# Altium PCB Quad FC V10.0.PcbDoc
Units mm, origin at the board's own origin, x right, y up, seen from the top; angles counter-clockwise.
Board outline 50 x 50 mm, 2 copper layers (Top Layer, Bottom Layer); 81 components, 49 nets, 331 pads, 113 vias.
Unrouted connection lines stored in the file: 24.
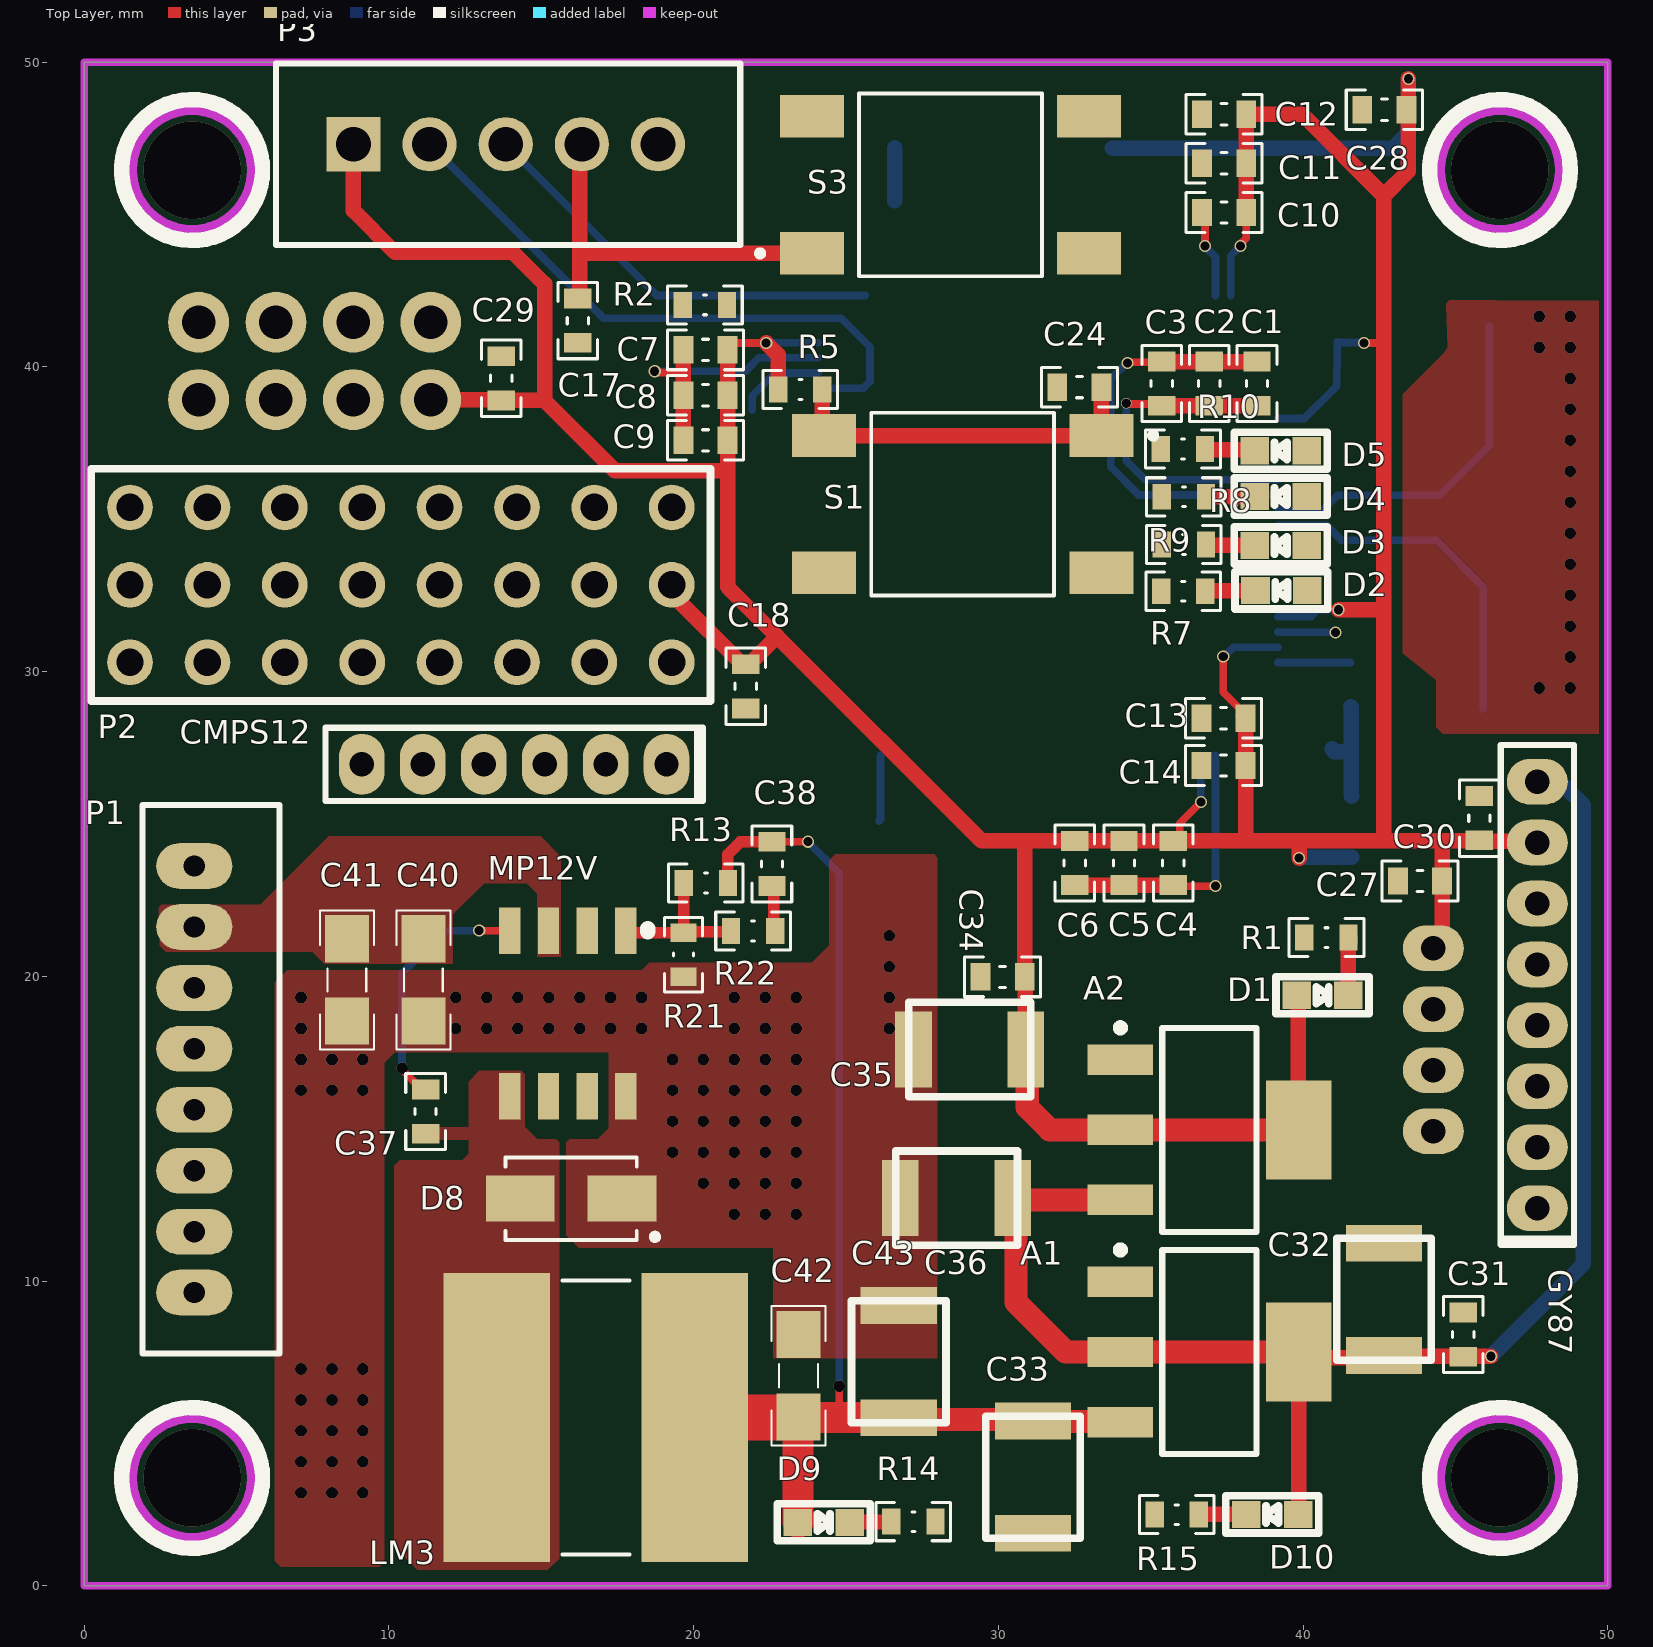
[diagram p0: Top Layer view]
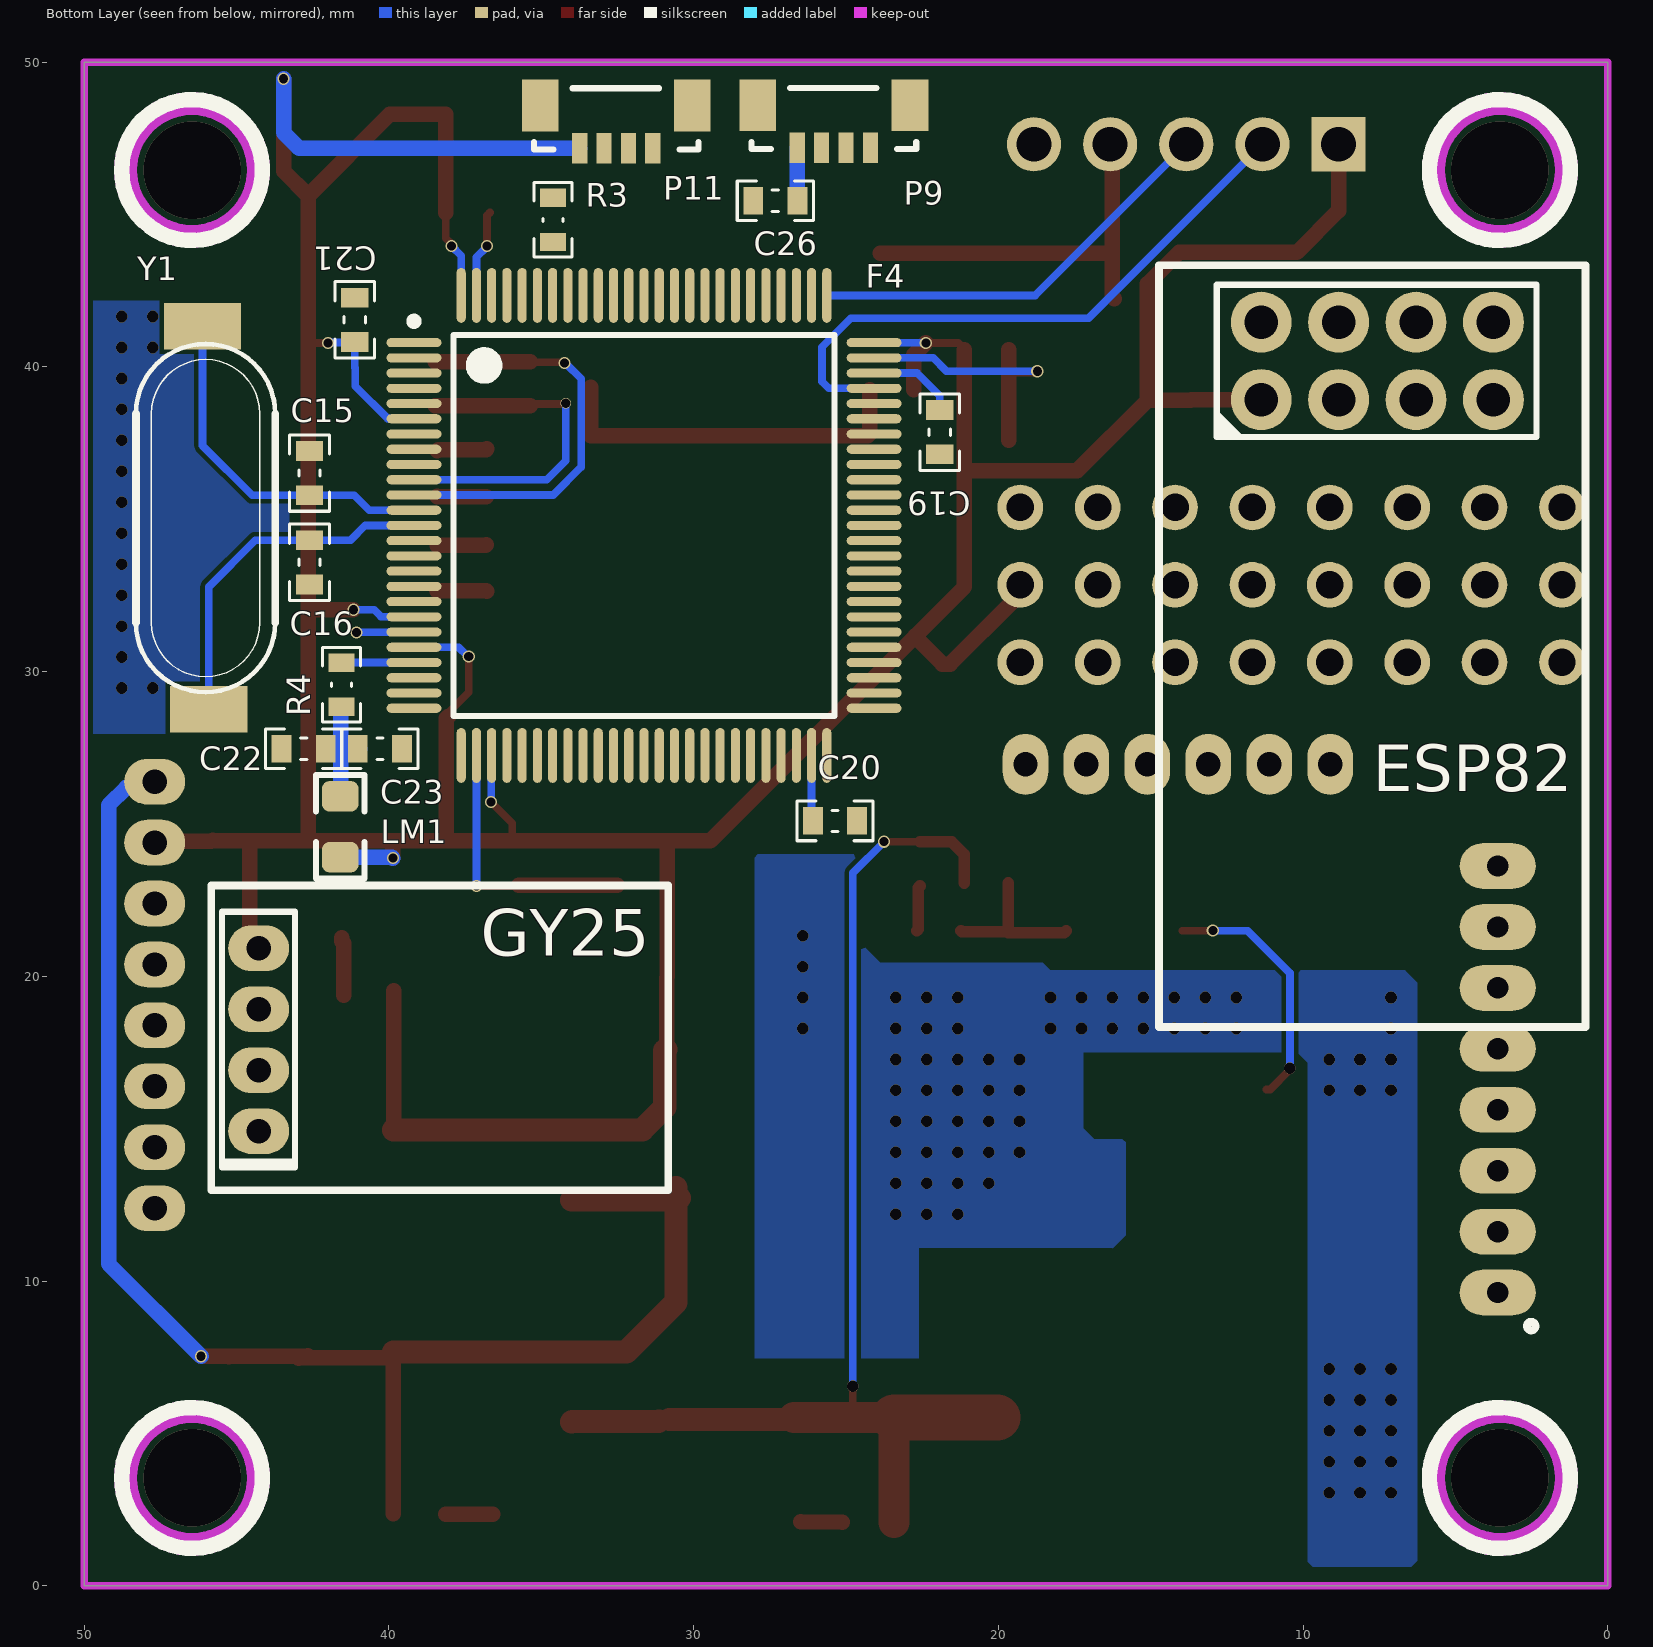
[diagram p1: Bottom Layer view, seen from below]

## Layer stack, top to bottom
Top Solder: solder mask 0.0102, Solder Resist, Dk 3.5
Top Layer: signal copper 0.0356
Dielectric 1: dielectric 0.32, FR-4, Dk 4.8
Bottom Layer: signal copper 0.0356
Bottom Solder: solder mask 0.0102, Solder Resist, Dk 3.5

## Board outline
0,0 50,0 50,50 0,50

## Design rules (kind name [scope] priority, off if disabled: settings)
Clearance [All] p1: gap=0.152 ignorepadtopadclearanceinfootprint=FALSE except(0: Arc-Hole Track-Hole SMDPad-Hole THPad-Hole Via-Hole Fill-Hole Poly-Hole Region-Hole Text-Hole)
HoleSize [All] p1: absolutevalues=TRUE maxlimit=10 minlimit=0.025 maxpercent=80.000 minpercent=20.000
PlaneConnect PlaneConnect_2 [All] p1: planeconnectstyle=Direct reliefexpansion=0.508 reliefentries=4 reliefconductorwidth=0.254 reliefairgap=0.254
PlaneConnect PlaneConnect_1 [All] p2: planeconnectstyle=Relief reliefexpansion=0.508 reliefentries=4 reliefconductorwidth=0.254 reliefairgap=0.254
PlaneConnect [All] p3: planeconnectstyle=Relief reliefexpansion=0.508 reliefentries=4 reliefconductorwidth=0.254 reliefairgap=0.254
PolygonConnect PolygonConnect_15 [All vs IsNamedPolygon('GND_L02_P008')] p1: connectstyle=Direct reliefconductorwidth=0.254 reliefentries=4 polygonreliefangle="90 Angle" airgapwidth=0.254
PolygonConnect PolygonConnect_14 [All vs IsNamedPolygon('GND_L01_P007')] p2: connectstyle=Direct reliefconductorwidth=0.254 reliefentries=4 polygonreliefangle="90 Angle" airgapwidth=0.254
PolygonConnect PolygonConnect_13 [All vs IsNamedPolygon('GND_L02_P001') Or IsNamedPolygon('GND_L02_P004')] p3: connectstyle=Direct reliefconductorwidth=0.254 reliefentries=4 polygonreliefangle="90 Angle" airgapwidth=0.254
PolygonConnect PolygonConnect_12 [All vs IsNamedPolygon('GND_L01_P006')] p4: connectstyle=Direct reliefconductorwidth=0.254 reliefentries=4 polygonreliefangle="90 Angle" airgapwidth=0.254
PolygonConnect PolygonConnect_11 [All vs IsNamedPolygon('GND_L01_P005')] p5: connectstyle=Direct reliefconductorwidth=0.254 reliefentries=4 polygonreliefangle="90 Angle" airgapwidth=0.254
PolygonConnect PolygonConnect_10 [All vs IsNamedPolygon('NETC37_1_L01_P002')] p6: connectstyle=Direct reliefconductorwidth=0.254 reliefentries=4 polygonreliefangle="90 Angle" airgapwidth=0.254
PolygonConnect PolygonConnect_9 [All vs IsNamedPolygon('MP1584-FB_L01_P005')] p7: connectstyle=Direct reliefconductorwidth=0.254 reliefentries=4 polygonreliefangle="90 Angle" airgapwidth=0.254
PolygonConnect PolygonConnect_8 [All vs IsNamedPolygon('GND_L02_P001')] p8: connectstyle=Direct reliefconductorwidth=0.254 reliefentries=4 polygonreliefangle="90 Angle" airgapwidth=0.254
PolygonConnect PolygonConnect_7 [All vs IsNamedPolygon('MP1584-FB_L01_P005')] p9: connectstyle=Direct reliefconductorwidth=0.254 reliefentries=4 polygonreliefangle="90 Angle" airgapwidth=0.254
PolygonConnect PolygonConnect_6 [All vs IsNamedPolygon('MP1584-FB_L01_P005')] p10: connectstyle=Direct reliefconductorwidth=0.254 reliefentries=4 polygonreliefangle="90 Angle" airgapwidth=0.254
PolygonConnect PolygonConnect_5 [All vs IsNamedPolygon('GND_L02_P004')] p11: connectstyle=Direct reliefconductorwidth=0.254 reliefentries=4 polygonreliefangle="90 Angle" airgapwidth=0.254
PolygonConnect PolygonConnect_4 [All vs IsNamedPolygon('NETC34_1_L01_P003')] p12: connectstyle=Direct reliefconductorwidth=0.254 reliefentries=4 polygonreliefangle="90 Angle" airgapwidth=0.254
PolygonConnect PolygonConnect_3 [All vs IsNamedPolygon('NETC34_2_L01_P002')] p13: connectstyle=Direct reliefconductorwidth=0.254 reliefentries=4 polygonreliefangle="90 Angle" airgapwidth=0.254
PolygonConnect PolygonConnect_2 [All vs IsNamedPolygon('GND_L02_P001')] p14: connectstyle=Direct reliefconductorwidth=0.254 reliefentries=4 polygonreliefangle="90 Angle" airgapwidth=0.254
PolygonConnect PolygonConnect_1 [All vs IsNamedPolygon('VBAT+_L01_P000')] p15: connectstyle=Direct reliefconductorwidth=0.254 reliefentries=4 polygonreliefangle="90 Angle" airgapwidth=0.254
PolygonConnect [All] p16: connectstyle=Relief reliefconductorwidth=0.254 reliefentries=4 polygonreliefangle="90 Angle" airgapwidth=0.254
RoutingVias [All] p1: holewidth=0.3 width=0.4 viastyle="Through Hole" minholewidth=0.254 minwidth=0.254 maxholewidth=5 maxwidth=5
SolderMaskExpansion [All] p1: expansion=0.102 istentingtop=FALSE
Width [All] p1: maxlimit=1.524 minlimit=0.152 preferedwidth=0.508
28 further rules are at their usual default settings.

## Classes and differential pairs
component class "Quad FC power V10.0": A1 A2 C31 C32 C33 C34 C35 C36 C37 C38 C40 C41 C42 C43 D1 D8 D9 D10 LM3 MP12V P1 R1 R13 R14 R15 R21 R22
component class "Quad FC V10.0": C1 C2 C3 C4 C5 C6 C7 C8 C9 C10 C11 C12 C13 C14 C15 C16 C17 C18 C19 C20 C21 C22 C23 C24 C26 C27 C28 C29 C30 CMPS12 D2 D3 D4 D5 ESP82 F4 GY25 GY87 LM1 P2 P3 P9 P11 R2 R3 R4 R5 R7 R8 R9 R10 S1 S3 Y1

## Components (designator, comment, footprint, x,y, rotation, side; value= is the part's Value field where it differs from the comment)
A1 "3v3 regulator" SOT230P700X180-4N 36.93,7.67 r0 top
A2 "5V regulator" SOT230P700X180-4N 36.93,14.96 r0 top
C1 "100nF" CAP0603 38.49,39.455 r90 top
C2 "4.7uF" CAP0603 36.925,39.455 r90 top
C3 "100nF" CAP0603 35.36,39.455 r90 top
C4 "100nF" CAP0603 35.74,23.72 r90 top
C5 "4.7uF" CAP0603 34.125,23.72 r90 top
C6 "100nF" CAP0603 32.51,23.72 r90 top
C7 "100nF" CAP0603 20.39,40.56 r0 top
C8 "4.7uF" CAP0603 20.39,39.075 r0 top
C9 "100nF" CAP0603 20.39,37.59 r0 top
C10 "100nF" CAP0603 37.41,45.07 r0 top
C11 "4.7uF" CAP0603 37.41,46.685 r0 top
C12 "100nF" CAP0603 37.41,48.3 r0 top
C13 "100nF" CAP0603 37.39,28.47 r180 top
C14 "1uF" CAP0603 37.39,26.92 r180 top
C15 "10pF" CAP0603 42.61,36.515 r270 bottom
C16 "10pF" CAP0603 42.61,33.59 r270 bottom
C17 "100nF" CAP0603 16.2,41.52 r270 top
C18 "100nF" CAP0603 21.71,29.52 r270 top
C19 "2.2uF" CAP0603 21.92,37.86 r270 bottom
C20 "2.2uF" CAP0603 25.36,25.1 r180 bottom
C21 "1uF" CAP0603 41.12,41.55 r270 bottom
C22 "100nF" CAP0603 42.8,27.47 r180 bottom
C23 "1uF" CAP0603 40.3,27.47 r0 bottom
C24 "100nF" CAP0603 32.66,39.34 r180 top
C26 "100nF" CAP0603 27.32,45.46 r0 bottom
C27 "100nF" CAP0603 43.84,23.13 r180 top
C28 "100nF" CAP0603 42.67,48.44 r180 top
C29 "100nF" CAP0603 13.68,39.63 r90 top
C30 "100nF" CAP0603 45.79,25.19 r270 top
C31 "100nF" CAP0603 45.26,8.24 r270 top
C32 "10uF" MY_CAP_SMD-B 42.66,9.4 r90 top value=3300u
C33 "10uF" MY_CAP_SMD-B 31.14,3.56 r270 top value=3300u
C34 "100nF" CAP0603 30.14,19.98 r0 top
C35 "10uF" MY_CAP_SMD-B 29.06,17.6 r180 top value=3300u
C36 "10uF" MY_CAP_SMD-B 28.63,12.72 r180 top value=3300u
C37 "100nF" CAP0603 11.2,15.56 r90 top
C38 "100nF" CAP0603 22.57,23.69 r90 top
C40 "2.2uF" CAPC3413X12N 11.13,19.88 r270 top
C41 "2.2uF" CAPC3413X12N 8.62,19.88 r270 top
C42 "10uF" CAPC3413X12N 23.44,6.89 r270 top
C43 "100uF" MY_CAP_SMD-B 26.73,7.35 r90 top value=3300u
CMPS12 "CMPS12" "SULLINS NPPN061BFCN" 14.11,26.96 r180 top
D1 "LED" "0603 - LED" 40.64,19.38 r0 top
D2 "LED" "0603 - LED" 39.29,32.67 r180 top
D3 "LED" "0603 - LED" 39.27,34.14 r180 top
D4 "LED" "0603 - LED" 39.27,35.75 r180 top
D5 "LED" "0603 - LED" 39.27,37.25 r180 top
D8 "SS34" DIOM4226X244N 15.98,12.7 r180 top
D9 "LED" "0603 - LED" 24.269,2.08 r0 top
D10 "LED" "0603 - LED" 38.989,2.34 r180 top
ESP82 "ESP82" "HARWIN M20-7830445" 7.56,40.2 r90 bottom
F4 "STM32F407VGT6" STM-LQFP100_N 31.63,34.8 r180 bottom locked
GY25 "GY-25" "SULLINS NPPN041BFCN" 44.28,17.92 r90 bottom
GY87 "GY87" "SULLINS NPPN081BFCN" 47.69,19.39 r90 top
LM1 "10uH" 0805L 41.6,24.91 r270 bottom value=FB805
LM3 "47uH" IND_RLS-105 16.79,5.52 r0 top
MP12V "MP9486AGN-Z" SOIC127P600X170-9N 15.87,18.78 r270 top
P1 "Connector 8" "JST B8B-PH-K" 3.61,16.62 r90 top
P2 "Radio Control" HEADER8X3 19.28,35.39 r180 top
P3 "Programming connector" Connector1X5 8.83,47.31 r0 top
P9 "MHDR_1X04" "JST BM04B-SURS-TF" 25.4,47.89 r180 bottom
P11 "MHDR_1X04" "JST BM04B-SURS-TF" 32.54,47.88 r180 bottom
R1 "1K" RES0603 40.77,21.27 r180 top
R2 "1K" RES0603 20.37,42.04 r180 top
R3 "1K" RES0603 34.62,44.83 r90 bottom
R4 "0" RES0603 41.56,29.57 r90 bottom
R5 "1K" RES0603 23.5,39.26 r0 top
R7 "1K" RES0603 36.07,32.64 r180 top
R8 "1K" RES0603 36.09,34.17 r180 top
R9 "1K" RES0603 36.09,35.74 r180 top
R10 "1K" RES0603 36.06,37.31 r180 top
R13 "590k" RES0603 20.4,23.065 r0 top value=1K
R14 "1K" RES0603 27.209,2.1 r0 top
R15 "1K" RES0603 35.855,2.33 r180 top
R21 "10k" RES0603 19.67,20.71 r90 top value=1K
R22 "10k" RES0603 21.95,21.49 r180 top value=1K
S1 "" SW_TL3301FF160QG 28.83,35.5 r180 top
S3 "" SW_TL3301FF160QG 28.43,45.98 r0 top
Y1 "CRYSTAL_SMD" "My_Crystal - SMD" 46.02,35.04 r90 bottom

## Footprints (in the part's own frame and the unit in brackets; to place one, negate y for a bottom-side part, rotate by r counter-clockwise, add the part's x,y. Pads: shape width x height; smd on the part's side, far side on the other; paste and mask are expansions set on the pad)
"0603 - LED" [mil]
  rect 37x35 smd: 1(-33.5,0) 2(33.5,0)
  silkscreen extent -60,-24 60,24, body extent -32,-16 32,16, height 43
0805L [mm] ",0805, 2012, 200X130"
  rrect50% 1x1.2 smd mask+0.075: 1(-1,0) 2(1,0)
  Top Layer pour cut-out: -0.5,0.8 0.5,0.8 0.5,-0.8 -0.5,-0.8
  silkscreen extent -1.7,-0.8 1.7,0.8, body extent -1,-0.6 1,0.6, height 0.95
CAP0603 [mm] "Chip Capacitor, 2-Leads, Body 1/60x0/80mm, IPC Medium Density DESIGNER:ABBAS BASEREH"
  rect 0.65x0.9 smd: 1(-0.725,0) 2(0.725,0)
  silkscreen extent -1.25,-0.65 1.25,0.65, body extent -0.82,-0.43 0.82,0.43, height 0.4
CAPC3413X12N [mm] "Chip Capacitor, 2-Leads, Body 3/40x1/30mm, IPC Medium Density-Design:Abbas Basereh"
  rect 1.55x1.45 smd: 1(-1.35,0) 2(1.35,0)
  silkscreen extent -2.29,-0.89 2.29,0.89, body extent -1,-0.62 1,0.63, height 0.78
Connector1X5 [mil] "Connector; Header; 5 Position"
  rect 70x70 hole 45: 1(0,0)
  round 70 hole 45: 2(98.43,0) 3(196.85,0) 4(295.28,0) 5(393.7,0)
  silkscreen extent -100,-130 500,104, body extent -93,-133 493,93, height 276
DIOM4226X244N [mm]
  rect 2.26x1.51 smd: 1(-1.67,0) 2(1.67,0)
  silkscreen extent -2.85,-1.35 2.15,1.35, body extent -2.6,-1.36 2.6,1.36, height 1.19
"HARWIN M20-7830445" [mm] "2.54mm DIL PC TAIL PIN HEADER ASSEMBLY"
  round 2 hole 1.1: 1(-1.27,3.81) 2(-1.27,1.27) 3(-1.27,-1.27) 4(-1.27,-3.81) 5(1.27,-3.81) 6(1.27,-1.27) 7(1.27,1.27) 8(1.27,3.81)
  silkscreen extent -2.5,-5.23 2.5,5.27, body extent -2.52,-5.28 2.52,5.28, height 8.5
HEADER8X3 [mm]
  round 1.5 hole 0.9: 1(0,0) 2(2.54,0) 3(5.08,0) 4(7.62,0) 5(10.16,0) 6(12.7,0) 7(15.24,0) 8(17.78,0) 9(0,2.54) 10(2.54,2.54) 11(5.08,2.54) 12(7.62,2.54) 13(10.16,2.54) 14(12.7,2.54) 15(15.24,2.54) 16(17.78,2.54) 17(0,5.08) 18(2.54,5.08) 19(5.08,5.08) 20(7.62,5.08) 21(10.16,5.08) 22(12.7,5.08) 23(15.24,5.08) 24(17.78,5.08)
  silkscreen extent -1.27,-1.27 19.05,6.35
IND_RLS-105 [mm]
  rect 3.5x9.5 smd: 1(-3.25,0) 2(3.25,0)
  silkscreen extent -1.1,-4.5 1.1,4.5
"JST B8B-PH-K" [mm]
  oval 1.5x2.5 hole 0.7: 1(-7,0) 2(-5,0) 3(-3,0) 4(-1,0) 5(1,0) 6(3,0) 7(5,0) 8(7,0)
  silkscreen extent -9,-2.8 9,1.7, body extent -8.95,-2.8 8.95,1.7, height 6
"JST BM04B-SURS-TF" [mm] "1.0mm pitch/Disconnectable Crimp style connector"
  rect 0.5x1 smd: 1(-1.2,-0.7) 2(-0.4,-0.7) 3(0.4,-0.7) 4(1.2,-0.7)
  rect 1.2x1.7 smd: M(-2.5,0.7) M(2.5,0.7)
  silkscreen extent -2.7,-0.74 2.71,1.27, body extent -2.7,-1.02 2.7,1.23, height 2.75
MY_CAP_SMD-B [mm] "3.1X4"
  rect 1.2x2.5 smd: +(-1.845,0) -(1.845,0)
  silkscreen extent -2,-1.55 2,1.55, body extent -1.85,-1.41 1.85,1.41, height 2.14
"My_Crystal - SMD" [mil]
  rect 60x100 smd: 1(-247.06,-3.93) 2(248.03,3.94)
  silkscreen extent -225,-90 225,90, body extent -247,-98 245,91, height 154
RES0603 [mm] "Chip Resistor, 2-Leads, Body 1/60x0/80mm, IPC Medium Density DESIGNER:ABBAS BASEREH"
  rect 0.6x0.85 smd: 1(-0.725,0) 2(0.725,0)
  silkscreen extent -1.22,-0.63 1.22,0.62, body extent -0.82,-0.43 0.82,0.43, height 0.4
SOIC127P600X170-9N [mm]
  rect 1.525x0.7 smd: 1(-2.712,1.905) 2(-2.712,0.635) 3(-2.712,-0.635) 4(-2.712,-1.905) 5(2.712,-1.905) 6(2.712,-0.635) 7(2.712,0.635) 8(2.712,1.905)
  silkscreen extent -2.79,2.62 -2.69,2.62, body extent -3,-2.45 3,2.45, height 1.7
SOT230P700X180-4N [mm] "SOT223, 4-Leads, Body 6.50x7.00mm (avg), Pitch 2.30mm, IPC Medium Density"
  rect 2.15x1 smd: 1(-2.925,2.3) 2(-2.925,0) 3(-2.925,-2.3)
  rect 2.15x3.25 smd: 4(2.925,0)
  silkscreen extent -3.05,-3.35 1.55,3.47, body extent -1.85,-3.35 1.85,3.35, height 1.8
STM-LQFP100_N [mm] "Thin QFP, 100-Leads, Body 14x14mm, Pitch 0.5mm, IPC Medium Density"
  oval 1.8x0.3 smd: 1(-7.55,6) 2(-7.55,5.5) 3(-7.55,5) 4(-7.55,4.5) 5(-7.55,4) 6(-7.55,3.5) 7(-7.55,3) 8(-7.55,2.5) 9(-7.55,2) 10(-7.55,1.5) 11(-7.55,1) 12(-7.55,0.5) 13(-7.55,0) 14(-7.55,-0.5) 15(-7.55,-1) 16(-7.55,-1.5) 17(-7.55,-2) 18(-7.55,-2.5) 19(-7.55,-3) 20(-7.55,-3.5) 21(-7.55,-4) 22(-7.55,-4.5) 23(-7.55,-5) 24(-7.55,-5.5) 25(-7.55,-6) 51(7.55,-6) 52(7.55,-5.5) 53(7.55,-5) 54(7.55,-4.5) 55(7.55,-4) 56(7.55,-3.5) 57(7.55,-3) 58(7.55,-2.5) 59(7.55,-2) 60(7.55,-1.5) 61(7.55,-1) 62(7.55,-0.5) 63(7.55,0) 64(7.55,0.5) 65(7.55,1) 66(7.55,1.5) 67(7.55,2) 68(7.55,2.5) 69(7.55,3) 70(7.55,3.5) 71(7.55,4) 72(7.55,4.5) 73(7.55,5) 74(7.55,5.5) 75(7.55,6)
  oval 0.3x1.8 smd: 26(-6,-7.55) 27(-5.5,-7.55) 28(-5,-7.55) 29(-4.5,-7.55) 30(-4,-7.55) 31(-3.5,-7.55) 32(-3,-7.55) 33(-2.5,-7.55) 34(-2,-7.55) 35(-1.5,-7.55) 36(-1,-7.55) 37(-0.5,-7.55) 38(0,-7.55) 39(0.5,-7.55) 40(1,-7.55) 41(1.5,-7.55) 42(2,-7.55) 43(2.5,-7.55) 44(3,-7.55) 45(3.5,-7.55) 46(4,-7.55) 47(4.5,-7.55) 48(5,-7.55) 49(5.5,-7.55) 50(6,-7.55) 76(6,7.55) 77(5.5,7.55) 78(5,7.55) 79(4.5,7.55) 80(4,7.55) 81(3.5,7.55) 82(3,7.55) 83(2.5,7.55) 84(2,7.55) 85(1.5,7.55) 86(1,7.55) 87(0.5,7.55) 88(0,7.55) 89(-0.5,7.55) 90(-1,7.55) 91(-1.5,7.55) 92(-2,7.55) 93(-2.5,7.55) 94(-3,7.55) 95(-3.5,7.55) 96(-4,7.55) 97(-4.5,7.55) 98(-5,7.55) 99(-5.5,7.55) 100(-6,7.55)
  silkscreen extent -7.68,-6.25 6.25,6.82, body extent -7,-7 7,7, height 1.6
"SULLINS NPPN041BFCN" [mm]
  oval 1.5x2 hole 0.8: 1(-3,0) 2(-1,0) 3(1,0) 4(3,0)
  silkscreen extent -4.2,-1.2 4.2,1.2, body extent -4.25,-1.2 4.25,1.2, height 4.41
"SULLINS NPPN061BFCN" [mm]
  oval 1.5x2 hole 0.8: 1(-5,0) 2(-3,0) 3(-1,0) 4(1,0) 5(3,0) 6(5,0)
  silkscreen extent -6.2,-1.2 6.2,1.2, body extent -6.25,-1.2 6.25,1.2, height 4.41
"SULLINS NPPN081BFCN" [mm]
  oval 1.5x2 hole 0.8: 1(-7,0) 2(-5,0) 3(-3,0) 4(-1,0) 5(1,0) 6(3,0) 7(5,0) 8(7,0)
  silkscreen extent -8.2,-1.2 8.2,1.2, body extent -8.25,-1.2 8.25,1.2, height 4.41
SW_TL3301FF160QG [mm]
  rect 2.1x1.4 smd: 1(-4.55,-2.25) 2(4.55,-2.25) 3(-4.55,2.25) 4(4.55,2.25)
  silkscreen extent -6.35,-3 3,3, body extent -5,-3 5,3, height 7.1

## Part data
A1 A2: library part ams1117
C1 C2 C3 C4 C5 C6 C7 C8 C9 C10 C11 C12 C13 C14 C15 C16 C17 C18 C19 C20 C21 C22 C23 C24 C26 C27 C28 C29 C30 C31 C34 C37 C38: library part "CAP SMD PACKAGE", "F407VET6 Power CAP", Data=2017-3-10, Desc.="CAP SMD TOTAL PACKAGES", Designer="Abbas Basereh"
C32 C33 C35 C36 C43: library part CAP_TANTAL_B, "3.5X2.8MM"
C40 C41 C42: library part "CAP SMD 0805", "CAP 0805", Data=16-12-2016, Desc.="CAP SMD 0805", Designer="Abbas Basereh"
CMPS12: library part NPPN061BFCN-RC, "CONN HDR 6POS 0.079 GOLD PCB", Current Rating (Amps)=2A, Insulation Color=Black, Manufacturer="Sullins Connector Solutions", Material Flammability Rating="UL94 V-0", Operating Temperature="-40°C ~ 105°C", Supplier Part Number 1=S5751-06-ND, ComponentLink1Description=Datasheet, ComponentLink1URL=https://drawings-pdf.s3.amazonaws.com/10483.pdf, ComponentLink2Description="DigiKey Link", ComponentLink2URL=https://www.digikey.com/en/products/detail/sullins-connector-solutions/NPPN061BFCN-RC/804808, Connector Type=Header, Contact Finish - Mating=Gold, Contact Finish - Post=Gold, Contact Finish Thickness - Mating=Flash, Contact Length - Post="0.094\" (2.40mm)", Contact Type="Female Socket", Fastening Type=Push-Pull, Insulation Height="0.173\" (4.40mm)", LastUpdated="6/21/2022 2:43:22 PM", Lifecycle Status=Active, Minimum Order=1, Mounting Type="Through Hole", Number of Positions=6, Number of Positions Loaded=All, Number of Rows=1, Packaging=Tube, Part Number=NPPN061BFCN-RC, Part Status=Active, Pitch - Mating="0.079\" (2.00mm)", Price=0.40, Series=-, Style="Board to Board", Supplier 1=DigiKey, Termination=Solder
D1 D2 D3 D4 D5 D9 D10: "Led", LatestRevisionDate=08-Jul-2005, LatestRevisionNote="Mech Layer 1 removed.", PackageReference=LED-0, Published=8-Jun-2000, Publisher="Altium Limited"
D8: library part "1n5822 SMD", Manufacturer="ON Semiconductor/Fairchild", Data=16-12-2016, Designer="Abbas Basereh", Link=https://www.aliexpress.com/item/Free-shipping-100pcs-1n5822-sma-smd-do-214ac-Schottky-diode-ss34/32337482329.html?spm=2114.01010208.3.1.zLZDsP&ws_ab_test=searchweb0_0,searchweb201602_4_10065_10068_10084_10083_10080_10082_10081_10060_10061_10062_10056_10055_10054_10059_10099_10078_10079_427_10073_10103_10102_10096_10052_10050_10051,searchweb201603_4&btsid=6e50dc92-ac69-45bc-a19e-209af19ce602, Part. No=SS34
ESP82: library part M20-7830442, "CONN RCPT 8POS 0.1 GOLD PCB", Current Rating (Amps)=3A, Insulation Color=Black, Manufacturer="Harwin Inc.", Material Flammability Rating="UL94 V-0", Operating Temperature="-40°C ~ 105°C", Supplier Part Number 1=952-1789-ND, ComponentLink1Description=Datasheet, ComponentLink1URL=https://cdn.harwin.com/pdfs/C001XX_M20_Series_Connectors.pdf, ComponentLink2Description="DigiKey Link", ComponentLink2URL=http://digikey.com/product-detail/en/harwin-inc/M20-7830442/952-1789-ND/3727758, Connector Type=Receptacle, Contact Finish - Mating=Gold, Contact Finish - Post=Tin, Contact Finish Thickness - Mating=Flash, Contact Length - Post="0.118\" (3.00mm)", Contact Type="Female Socket", Fastening Type=Push-Pull, Insulation Height="0.335\" (8.51mm)", LastUpdated="9/21/2022 7:04:26 PM", Lifecycle Status=Active, Mated Stacking Heights="11.04mm, 12.63mm", Minimum Order=1, Mounting Type="Through Hole", Number of Positions=8, Number of Positions Loaded=All, Number of Rows=2, Packaging=Tube, Part Number=M20-7830442, Part Status=Active, Pitch - Mating="0.100\" (2.54mm)", Price=1.36, Row Spacing - Mating="0.100\" (2.54mm)", Series=M20, Style="Board to Board or Cable", Supplier 1=DigiKey, Termination=Solder
F4: "ARM Cortex-M4 32-bit MCU+FPU, 210 DMIPS, 1024 kB Flash, 192 kB Internal RAM, 82 I/Os, 100-pin LQFP, -40 to 85 degC, Tray", I/Os (High Current)=82, Manufacturer=STMicroelectronics, Operating Frequency(F) (Processor speed) (MHz)=168, Supplier Part Number 1=497-11605-ND, Supply Voltage(Vcc) max (V)=3.6, Supply Voltage(Vcc) min (V)=1.8, ComponentLink1Description="Manufacturer URL", ComponentLink1URL=http://www.st.com/web/en/home.html, ComponentLink2Description=Datasheet, ComponentLink2URL=http://www.st.com/st-web-ui/static/active/en/resource/technical/document/datasheet/DM00037051.pdf, ComponentLink3Description="Package Specification", ComponentLink3URL=http://www.st.com/st-web-ui/static/active/en/resource/technical/document/data_brief/DM00071938.pdf, Core="ARM Cortex-M4", D/A Converter=2x12-bit, DatasheetVersion="Rev. 4", FLASH Size (Prog) (kB)=1024, Internal RAM Size (kB)=192, Mounting Technology="Surface Mount", PackageDescription="100-Pin Low Profile Quad Flat Package, 14 x 14 mm Body, 0.5 mm Pitch", PackageReference=LQFP100, PackageVersion="Rev. 1, 06/2013", Packing=Tray, PartNumber=STM32F407VGT6, Supplier 1=Digi-Key, Supplier 2=Farnell, Supplier 3=Newark, Supplier 4=Mouser, Supplier Part Number 2=2064368, Supplier Part Number 3=73T2333, Supplier Part Number 4=511-STM32F407VGT6
GY25: library part NPPN041BFCN-RC, "CONN HDR 4POS 0.079 GOLD PCB", Current Rating (Amps)=2A, Insulation Color=Black, Manufacturer="Sullins Connector Solutions", Material Flammability Rating="UL94 V-0", Operating Temperature="-40°C ~ 105°C", Supplier Part Number 1=S5751-04-ND, ComponentLink1Description=Datasheet, ComponentLink1URL=https://drawings-pdf.s3.amazonaws.com/10483.pdf, ComponentLink2Description="DigiKey Link", ComponentLink2URL=https://www.digikey.com/en/products/detail/sullins-connector-solutions/NPPN041BFCN-RC/804806, Connector Type=Header, Contact Finish - Mating=Gold, Contact Finish - Post=Gold, Contact Finish Thickness - Mating=Flash, Contact Length - Post="0.094\" (2.40mm)", Contact Type="Female Socket", Fastening Type=Push-Pull, Insulation Height="0.173\" (4.40mm)", LastUpdated="6/21/2022 2:42:51 PM", Lifecycle Status=Active, Minimum Order=1, Mounting Type="Through Hole", Number of Positions=4, Number of Positions Loaded=All, Number of Rows=1, Packaging=Tube, Part Number=NPPN041BFCN-RC, Part Status=Active, Pitch - Mating="0.079\" (2.00mm)", Price=0.30, Series=-, Style="Board to Board", Supplier 1=DigiKey, Termination=Solder
GY87: library part NPPN081BFCN-RC, "CONN HDR 8POS 0.079 GOLD PCB", Current Rating (Amps)=2A, Insulation Color=Black, Manufacturer="Sullins Connector Solutions", Material Flammability Rating="UL94 V-0", Operating Temperature="-40°C ~ 105°C", Supplier Part Number 1=S5751-08-ND, ComponentLink1Description=Datasheet, ComponentLink1URL=https://drawings-pdf.s3.amazonaws.com/10483.pdf, ComponentLink2Description="DigiKey Link", ComponentLink2URL=https://www.digikey.com/en/products/detail/sullins-connector-solutions/NPPN081BFCN-RC/804810, Connector Type=Header, Contact Finish - Mating=Gold, Contact Finish - Post=Gold, Contact Finish Thickness - Mating=Flash, Contact Length - Post="0.094\" (2.40mm)", Contact Type="Female Socket", Fastening Type=Push-Pull, Insulation Height="0.173\" (4.40mm)", LastUpdated="6/21/2022 2:43:53 PM", Lifecycle Status=Active, Minimum Order=1, Mounting Type="Through Hole", Number of Positions=8, Number of Positions Loaded=All, Number of Rows=1, Packaging=Tube, Part Number=NPPN081BFCN-RC, Part Status=Active, Pitch - Mating="0.079\" (2.00mm)", Price=0.44, Series=-, Style="Board to Board", Supplier 1=DigiKey, Termination=Solder
LM1 LM3: library part "L SMA 0.25W", "Inductor", Code_IEC=1005, Code_JEITA=0402, LatestRevisionDate=29-May-2009, LatestRevisionNote="IPC-7351 Footprint Added.", PackageDescription="Chip Inductor", PackageReference=0402-A, Published=8-Jun-2000, Publisher="Altium Limited"
MP12V: "Buck Switching Regulator IC Positive Fixed 5V 1 Output 1A 8-SOIC (0.154, 3.90mm Width) Exposed Pad", Package="SOIC-8 Monolithic Power", Check_prices=https://www.snapeda.com/parts/MP9486AGN-Z/Monolithic+Power+Systems+Inc./view-part/?ref=eda, MF="Monolithic Power", MP=MP9486AGN-Z, SnapEDA_Link=https://www.snapeda.com/parts/MP9486AGN-Z/Monolithic+Power+Systems+Inc./view-part/?ref=snap
P1: library part Connector1x8, "Connector, 8-Pin2.5mm", LatestRevisionDate=17-Jul-2002, LatestRevisionNote="Re-released for DXP Platform.", Publisher="Altium Limited"
P2: library part MHDR_2X12, "Male Header 2X12"
P3: library part Connector1x5, "Connector, 5-Pin2.5mm", LatestRevisionDate=17-Jul-2002, LatestRevisionNote="Re-released for DXP Platform.", Publisher="Altium Limited"
P9 P11: "Male Header 1X04"
R1 R2 R3 R4 R5 R7 R8 R9 R10 R14 R15: library part "RES SMD PACKAGE", "TOTAL SMD RESISTOR PACK", Data=2017-3-10, Desc.="RES SMD PAKAGES", Designer="Abbas Basereh"
R13 R21 R22: library part "RES SMD PACKAGE", "To Limit current", Data=2017-3-10, Desc.="RES SMD PAKAGES", Designer="Abbas Basereh"
S1 S3: library part TL3301FF160QG, "Tactile switch for manual RESET", Package=None, Availability="In Stock", Check_prices=https://www.snapeda.com/parts/TL3301FF160QG/E-Switch/view-part/?ref=eda, MF=E-Switch, MP=TL3301FF160QG, Price=None, Purchase-URL=https://pricing.snapeda.com/search/part/TL3301FF160QG/?ref=eda, SnapEDA_Link=https://www.snapeda.com/parts/TL3301FF160QG/E-Switch/view-part/?ref=snap
Y1: "Crystal"

## Via types
v1: diameter 0.381, hole 0.381, Top Layer to Bottom Layer, 92 vias
v2: diameter 0.4, hole 0.3, Top Layer to Bottom Layer, 16 vias
v3: diameter 3.2, hole 3.2, Top Layer to Bottom Layer, 4 vias
v4: diameter 0.35, hole 0.3, Top Layer to Bottom Layer, 1 vias

## Nets (pads, with @x,y where several pads share a name; then routed paths per layer and width w, separated by ;. In a path a pad name is that pad's centre, name@x,y a point inside that pad or via, vN(x,y) a via of type N, cw(c..) or ccw(c..) an arc to the next point about the centre after c; other vN are vias at no path point)
3V3: A2.2 A2.4 C1.2 C2.2 C3.2 C4.2 C5.2 C6.2 C7.2 C8.2 C9.2 C10.2 C11.2 C12.2 C13.1 C14.1 C18.1 C21.2 C26.1 C27.1 C28.1 C29.1 C30.2 C34.2 C35.+ D1.1 ESP82.1 F4.6 F4.11 F4.19 F4.21 F4.28 F4.50 F4.75 F4.100 GY25.4 GY87.7 LM1.2 P2.9 P3.1 P9.1 P11.1 R2.1 R5.1 | length 185
  Top Layer w0.254: C7.2 21.115,40.592 21.313,40.79 22.313,40.79 v2(22.38,40.79) ; v2(34.24,40.13) 34.265,40.155 35.335,40.155 C3.2 ; C4.2 35.958,24.663 35.958,25.028 v2(36.65,25.72) ; v2(37.38,30.5) 37.38,29.33 38.044,28.666 C13.1@38.044,28.541 ; v2(37.95,43.97) 37.95,44.037 38.135,44.222 C10.2 ; v2(42,40.79) 42.64,40.79 42.65,40.78
  Top Layer w0.508: P3.1 8.83,45.13 10.2,43.76 14.07,43.76 15.105,42.725 15.105,38.905 ; ESP82.1 11.383,38.918 13.667,38.918 C29.1 15.105,38.905 ; P2.9@19.3,32.87 P2.9 19.47,32.66 19.47,32.36 21.585,30.245 C18.1 21.835,30.245 22.725,31.135 22.725,31.175 ; 21.11,36.595 17.415,36.595 15.105,38.905 ; C7.2 C8.2 C9.2 21.115,32.785 22.725,31.175 ; v2(22.38,40.79) 22.775,40.395 R5.1 ; C35.+ 30.885,17.62 30.885,19.96 C34.2 30.865,24.445 ; C3.2 C2.2 C1.2 ; C13.1@38.044,28.541 C13.1 C14.1 38.115,24.62 38.29,24.445 ; C10.2 C11.2 C12.2 39.97,48.3 42.65,45.62 ; D1.1@39.841,19.53 39.841,14.974 A2.4 ; v2(39.87,23.88) 39.87,24.445 ; v2(41.17,32.03) 42.65,32.03 ; v2(43.46,49.46) 43.46,46.43 42.65,45.62 ; GY25.4@44.56,20.94 44.565,20.945 C27.1 44.565,24.44 44.57,24.445 ; C30.2 C30.2@45.81,24.445 ; GY87.7 47.652,24.427 45.827,24.427 C30.2@45.81,24.445 ; GY87.7@48.153,24.418 GY87.7@48.17,24.4 ; 22.725,31.175 29.455,24.445 30.865,24.445 ; 30.865,24.445 C6.2 C5.2 C4.2 38.29,24.445 ; 38.29,24.445 39.87,24.445 ; 39.87,24.445 42.65,24.445 ; 42.65,24.445 42.65,32.03 ; 42.65,24.445 44.57,24.445 ; 42.65,32.03 42.65,40.78 42.65,41.75 42.65,45.62 ; 44.57,24.445 C30.2@45.81,24.445
  Top Layer w0.762: C35.+ 30.949,17.556 30.949,15.701 31.69,14.96 A2.2 A2.4
  Bottom Layer w0.254: v2(22.38,40.79) 22.385,40.795 24.075,40.795 F4.75 ; v2(34.24,40.13) 34.211,40.13 33.69,39.609 33.69,36.72 34.61,35.8 F4.11 ; F4.28 36.64,27.24 36.64,25.73 v2(36.65,25.72) ; v2(37.38,30.5) 37.419,30.5 37.72,30.8 F4.21 ; F4.100 37.63,43.65 v2(37.95,43.97) ; F4.19 40.26,31.8 40.49,32.03 v2(41.17,32.03) ; F4.6 39.189,38.309 40.046,38.309 41.11,39.373 41.11,39.97 41.12,39.98 C21.2 41.137,40.807 41.982,40.807 v2(42,40.79)
  Bottom Layer w0.508: C26.1 26.595,46.943 26.6,46.948 P9.1 ; P11.1 42.95,47.18 43.46,47.69 v2(43.46,49.46) ; v2(39.87,23.88) 39.9,23.91 LM1.2
5V: A1.2 A1.4 A2.3 C31.2 C32.+ C36.+ D10.1 GY87.8 | length 50
  Top Layer w0.254: D10.1 D10.1@39.855,2.355
  Top Layer w0.508: D10.1@39.855,2.355 A1.4 40.05,7.475 42.95,7.475 C32.+@42.962,7.462 ; C32.+ 42.68,7.535 45.24,7.535 C31.2 45.275,7.53 v2(46.17,7.53)
  Top Layer w0.762: C36.+ 30.535,12.66 C36.+@30.58,12.66 ; C36.+@30.58,13.06 C36.+@30.58,12.66 ; A2.3 C36.+@30.58,12.66 ; A1.4 A1.2 32.21,7.67 30.58,9.3 C36.+@30.58,12.66
  Bottom Layer w0.508: v2(46.17,7.53) 49.2,10.56 49.2,25.62 48.62,26.2 48.37,26.2 GY87.8@48.17,26.4
12V: A1.3 C33.+ C38.2 C42.2 C43.+ D9.1 LM3.2 R13.2 | length 40.1
  Top Layer w0.254: C38.2 22.573,24.417 23.748,24.417 v2(23.75,24.42) ; 24.78,5.522 v1(24.78,6.55)
  Top Layer w0.381: R13.2 21.125,24.005 21.535,24.415 C38.2
  Top Layer w0.762: C42.2 C42.2@23.458,5.522 ; C43.+@26.712,5.522 C43.+ 26.78,5.455 C33.+@30.793,5.455 ; C33.+ 31.158,5.388 33.987,5.388 A1.3
  Top Layer w1.016: D9.1 23.418,5.518 C42.2@23.42,5.52 ; C42.2@23.458,5.522 24.78,5.522 C43.+@26.712,5.522
  Top Layer w1.524: LM3.2 C42.2@23.42,5.52
  Bottom Layer w0.254: v2(23.75,24.42) 24.78,23.39 v1(24.78,6.55)
"ESC Rx": F4.80 P1.2
"ESC Tx": F4.83 P1.1
"ESP82 RX": ESP82.8 F4.23
"ESP82 TX": ESP82.4 F4.24
"F407 NRST": C17.1 F4.14 P3.4 R2.2 S3.1 S3.2 | length 12.7
  Top Layer w0.508: C17.1 16.265,42.31 16.265,43.73 ; P3.4 16.265,47.245 16.265,43.73 ; S3.1 16.265,43.73
"F407 OSC IN": C15.2 F4.12 Y1.2 | length 11.7
  Bottom Layer w0.254: F4.12 40.65,35.3 41.14,35.79 C15.2 44.49,35.79 46.12,37.42 Y1.2
"F407 OSC OUT": C16.1 F4.13 Y1.1 | length 11.6
  Bottom Layer w0.254: F4.13 40.78,34.8 41.265,34.315 C16.1 44.385,34.315 45.92,32.78 Y1.1
"F407 SWCLK": F4.76 P3.3 | length 13.9
  Bottom Layer w0.254: P3.3 18.79,42.35 F4.76
"F407 SWDIO": F4.72 P3.2 | length 20.1
  Bottom Layer w0.254: P3.2 17.04,41.6 24.84,41.6 25.79,40.65 25.79,39.527 25.563,39.3 F4.72
GND: A1.1 A2.1 C1.1 C2.1 C3.1 C4.1 C5.1 C6.1 C7.1 C8.1 C9.1 C10.1 C11.1 C12.1 C13.2 C14.2 C15.1 C16.2 C17.2 C18.2 C19.2 C20.2 C21.1 C22.1 C23.1 C24.2 C26.2 C27.2 C28.2 C29.2 C30.1 C31.1 C32.- C33.- C34.1 C35.- C36.- C40.2 C41.2 C42.1 C43.- D8.1 ESP82.5 F4.10 F4.20 F4.27 F4.74 F4.99 GY25.1 GY87.6 MP12V.8 P1.8 P2.17 P2.18 P2.19 P2.20 P2.21 P2.22 P2.23 P2.24 P3.5 P9.4 P11.4 R1.2 R3.2 R7.2 R8.2 R9.2 R10.2 R14.2 R15.2 R21.1 S1.3 S1.4 S3.3 S3.4 | length 34.6
  Top Layer w0.254: v2(18.72,39.86) 18.762,39.817 19.665,39.817 ; v4(34.2,38.81) 34.228,38.782 35.308,38.782 C3.1 ; C4.1 35.775,22.96 v2(37.13,22.96) ; C10.1 36.78,44.975 v2(36.78,43.97)
  Top Layer w0.508: C9.1 C8.1 19.665,39.817 C7.1 ; C6.1 C5.1 C4.1 ; C3.1 C2.1 C1.1
  Bottom Layer w0.254: v2(18.72,39.86) 21.7,39.86 22.14,40.3 F4.74 ; v4(34.2,38.81) 34.2,36.924 34.824,36.3 F4.10 ; v2(36.78,43.97) 36.78,43.956 37.13,43.606 F4.99 ; v2(37.13,22.96) F4.27 ; F4.20 39.185,31.295 41.065,31.295 v2(41.07,31.29)
  other v1: 7.112,3.048 8.128,3.048 9.144,3.048 7.112,4.064 8.128,4.064 9.144,4.064 7.112,5.08 8.128,5.08 9.144,5.08 7.112,6.096 8.128,6.096 9.144,6.096 7.112,7.112 8.128,7.112 9.144,7.112 21.336,12.192 22.352,12.192 23.368,12.192 20.32,13.208 21.336,13.208 22.352,13.208 23.368,13.208 19.304,14.224 20.32,14.224 21.336,14.224 22.352,14.224 23.368,14.224 19.304,15.24 20.32,15.24 21.336,15.24 22.352,15.24 23.368,15.24 7.112,16.256 8.128,16.256 9.144,16.256 19.304,16.256 20.32,16.256 21.336,16.256 22.352,16.256 23.368,16.256 7.112,17.272 8.128,17.272 9.144,17.272 19.304,17.272 20.32,17.272 21.336,17.272 22.352,17.272 23.368,17.272 7.112,18.288 12.192,18.288 13.208,18.288 14.224,18.288 15.24,18.288 16.256,18.288 17.272,18.288 18.288,18.288 21.336,18.288 22.352,18.288 23.368,18.288 26.416,18.288 7.112,19.304 12.192,19.304 13.208,19.304 14.224,19.304 15.24,19.304 16.256,19.304 17.272,19.304 18.288,19.304 21.336,19.304 22.352,19.304 23.368,19.304 26.416,19.304 26.416,20.32 26.416,21.336 47.752,29.464 48.768,29.464 48.768,30.48 48.768,31.496 48.768,32.512 48.768,33.528 48.768,34.544 48.768,35.56 48.768,36.576 48.768,37.592 48.768,38.608 48.768,39.624 47.752,40.64 48.768,40.64 47.752,41.656 48.768,41.656
"GY25 Rx": GY25.3
"GY25 Tx": GY25.2
"GY87 SCL": F4.47 GY87.5
"GY87 SDA": F4.48 GY87.4
LED1: D2.1
LED2: D3.1
LED3: D5.1
LED4: D4.1
"MP9486 FB": MP12V.1 R13.1 R21.2 R22.2 | length 5.1
  Top Layer w0.381: MP12V.1 17.832,21.435 R21.2 R21.2@19.673,21.437 ; R13.1 19.673,23.062 R21.2@19.673,21.437 ; R22.2 21.198,21.462 19.697,21.462 R21.2@19.673,21.437
NetC19_1: C19.1 F4.73 | length 2.9
  Bottom Layer w0.254: C19.1 21.92,39.06 22.66,39.8 F4.73
NetC20_1: C20.1 F4.49 | length 2.2
  Bottom Layer w0.254: C20.1 26.13,25.145 F4.49
NetC22_2: C22.2 C23.2 LM1.1 R4.1 | length 3.6
  Bottom Layer w0.508: C23.2@40.955,27.47 40.955,27.449 41.026,27.377 41.58,27.377 ; R4.1 41.58,28.825 41.58,27.377 ; LM1.1 41.58,25.93 41.58,27.377
NetC37_1: C37.1 D8.2 LM3.1 MP12V.5
NetC37_2: C37.2 MP12V.4 | length 8.3
  Top Layer w0.254: v1(10.43,16.98) 10.43,16.93 11.075,16.285 C37.2 ; v2(12.96,21.5) 13.957,21.5 MP12V.4
  Bottom Layer w0.254: v1(10.43,16.98) 10.43,20.11 11.82,21.5 v2(12.96,21.5)
NetC38_1: C38.1 R22.1 | length 1.5
  Top Layer w0.381: C38.1 22.623,22.913 22.623,21.543 R22.1
NetD1_2: D1.2 R1.1 | length 1.9
  Top Layer w0.508: D1.2 41.491,21.091 41.545,21.145 R1.1@41.545,21.27
NetD2_2: D2.2 R7.1 | length 1.7
  Top Layer w0.508: R7.1 36.81,32.655 38.424,32.655 D2.2
NetD3_2: D3.2 R8.1 | length 1.6
  Top Layer w0.508: R8.1 36.83,34.155 38.404,34.155 D3.2
NetD4_2: D4.2 R9.1 | length 1.6
  Top Layer w0.508: R9.1 36.82,35.745 38.414,35.745 D4.2
NetD5_2: D5.2 R10.1 | length 1.7
  Top Layer w0.508: R10.1 36.815,37.28 38.389,37.28 D5.2
NetD9_2: D9.2 R14.1 | length 1.4
  Top Layer w0.508: D9.2 25.13,2.09 26.474,2.09 R14.1
NetD10_2: D10.2 R15.1 | length 1.6
  Top Layer w0.254: R15.1 R15.1@36.59,2.34
  Top Layer w0.508: R15.1@36.59,2.34 D10.2
NetF4_22: F4.22 R4.2 | length 2.4
  Bottom Layer w0.254: F4.22 39.182,30.298 41.557,30.298 R4.2
NetF4_94: F4.94 R3.1
NetMP12V_6: MP12V.6 MP12V.7
PushButton1: C24.1 R5.2 S1.1 S1.2 | length 12.2
  Top Layer w0.508: R5.2 24.225,37.805 S1.2 S1.1 33.385,37.755 C24.1
"PWM MOTOR 1": F4.35 P1.3
"PWM MOTOR 2": F4.36 P1.4
"PWM MOTOR 3": F4.31 P1.5
"PWM MOTOR 4": F4.32 P1.6
"RC PWM INPUT 1": P2.1
"RC PWM INPUT 2": F4.53 P2.2
"RC PWM INPUT 3": F4.63 P2.3
"RC PWM INPUT 4": F4.4 P2.4
"RC PWM INPUT 5": F4.40 P2.5
VBAT+: C40.1 C41.1 MP12V.3 P1.7
pads on no net: CMPS12.1 CMPS12.2 CMPS12.3 CMPS12.4 CMPS12.5 CMPS12.6 ESP82.2 ESP82.3 ESP82.6 ESP82.7 F4.1 F4.2 F4.3 F4.5 F4.7 F4.8 F4.9 F4.15 F4.16 F4.17 F4.18 F4.25 F4.26 F4.29 F4.30 F4.33 F4.34 F4.37 F4.38 F4.39 F4.41 F4.42 F4.43 F4.44 F4.45 F4.46 F4.51 F4.52 F4.54 F4.55 F4.56 F4.57 F4.58 F4.59 F4.60 F4.61 F4.62 F4.64 F4.65 F4.66 F4.67 F4.68 F4.69 F4.70 F4.71 F4.77 F4.78 F4.79 F4.81 F4.82 F4.84 F4.85 F4.86 F4.87 F4.88 F4.89 F4.90 F4.91 F4.92 F4.93 F4.95 F4.96 F4.97 F4.98 GY87.1 GY87.2 GY87.3 MP12V.2 P2.6 P2.7 P2.8 P2.10 P2.11 P2.12 P2.13 P2.14 P2.15 P2.16 P9.2 P9.3 P9.M P11.2 P11.3 P11.M
copper on no net:
  other v3: 3.536,3.536 46.464,3.536 3.536,46.464 46.464,46.464

## Polygon pours and split planes (outlines as drawn)
GND on Top Layer "GND_L01_P007" (solid, pour order 7): 46.13,27.96 46.12,27.97 44.59,27.97 44.379,28.181 44.379,29.711 43.274,30.61 43.274,39.104 44.625,40.455 44.747,40.655 44.698,42.138 44.75,42.19 46.34,42.19 46.35,42.18 50,42.18 50,27.96
GND on Top Layer "GND_L01_P006" (solid, remove dead copper, pour order 6): 27.89,24.01 28,23.9 28,7.46 22.62,7.46 22.62,11.09 16.27,11.09 16.25,11.07 15.82,11.5 15.82,14.55 15.93,14.66 16.86,14.66 17.22,15.02 17.22,20.19 17.23,20.2 18.3,20.2 18.55,20.45 23.88,20.45 24.45,21.02 24.45,23.81 24.65,24.01
GND on Top Layer "GND_L01_P005" (solid, remove dead copper, pour order 5): 9.68,0.62 9.85,0.79 9.85,17.17 10.19,17.51 17.86,17.51 17.86,20.2 6.64,20.2 6.64,20.18 6.25,19.79 6.25,0.81 6.44,0.62
NetC37_1 on Top Layer "NETC37_1_L01_P002" (solid, remove dead copper, pour order 2): 15.58,14.56 15.49,14.65 14.87,14.65 14.46,15.06 14.46,16.78 14.34,16.9 12.97,16.9 12.61,16.54 12.61,15.04 10.98,15.04 10.97,15.03 10.97,14.67 11,14.64 11.395,14.64 12.6,14.64 12.61,14.61 12.61,14.17 12.4,13.96 10.35,13.96 10.17,13.78 10.17,1.27 10.92,0.52 15.21,0.52 15.58,0.89
VBAT+ on Top Layer "VBAT+_L01_P000" (solid, remove dead copper, pour order 0): 14.86,22.71 14.52,23.06 13.12,23.06 12.09,22.03 12.09,20.42 7.87,20.42 7.48,20.81 2.67,20.81 2.47,21.01 2.44,22.35 5.78,22.35 8.02,24.59 14.98,24.59 15.64,23.93 15.64,20.65 14.86,20.65
GND on Bottom Layer "GND_L02_P008" (solid, remove dead copper, pour order 8): 46.13,27.96 46.12,27.97 44.59,27.97 44.379,28.181 44.379,29.711 43.274,30.6 43.274,39.104 44.625,40.455 44.747,40.655 44.698,42.138 44.75,42.19 46.34,42.19 46.35,42.18 50,42.18 50,27.96
GND on Bottom Layer "GND_L02_P004" (solid, pour order 4): 27.89,24.01 28,23.9 28,7.46 22.62,7.46 22.62,11.09 16.27,11.09 16.25,11.07 15.82,11.5 15.82,14.55 15.93,14.66 16.86,14.66 17.22,15.02 17.22,20.19 17.23,20.2 18.3,20.2 18.55,20.45 23.88,20.45 24.45,21.02 24.45,23.81 24.65,24.01
GND on Bottom Layer "GND_L02_P001" (solid, pour order 1): 9.68,0.62 9.85,0.79 9.85,17.17 10.19,17.51 17.86,17.51 17.86,20.2 6.64,20.2 6.64,20.18 6.25,19.79 6.25,0.81 6.44,0.62

## Keep-outs
Keep-Out Layer:
  circle w0.75: c46.464,3.536 r2.179
  circle w0.75: c46.464,46.464 r2.179
  circle w0.75: c3.536,46.464 r2.179
  circle w0.75: c3.536,3.536 r2.179
  lines w0.254: 0,0 50,0 50,50 0,50 0,0

## Silkscreen, mask and mechanical layers (free items; w line width, h text height)
Top Overlay:
  circle w0.508: c3.536,3.536 r2.312
  circle w0.508: c46.464,46.464 r2.312
  circle w0.508: c3.536,46.464 r2.312
  circle w0.508: c46.464,3.536 r2.312
Bottom Overlay:
  circle w0.508: c46.464,46.464 r2.312
  circle w0.508: c3.536,46.464 r2.312
  circle w0.508: c3.536,3.536 r2.312
  circle w0.508: c46.464,3.536 r2.312
  lines w0.254: 0.73,18.34 0.73,43.34 14.73,43.34 14.73,18.34 0.73,18.34 ; 30.83,12.98 30.83,22.98 45.83,22.98 45.83,12.98 30.83,12.98